# Altium PCB LM5161_Buck_PCB.PcbDoc (part 1 of 2)
Units mm, origin at the board's own origin, x right, y up, seen from the top; angles counter-clockwise.
Board outline 45.09 x 26.42 mm, 2 copper layers (Top Layer, Bottom Layer); 30 components, 16 nets, 70 pads, 9 vias.
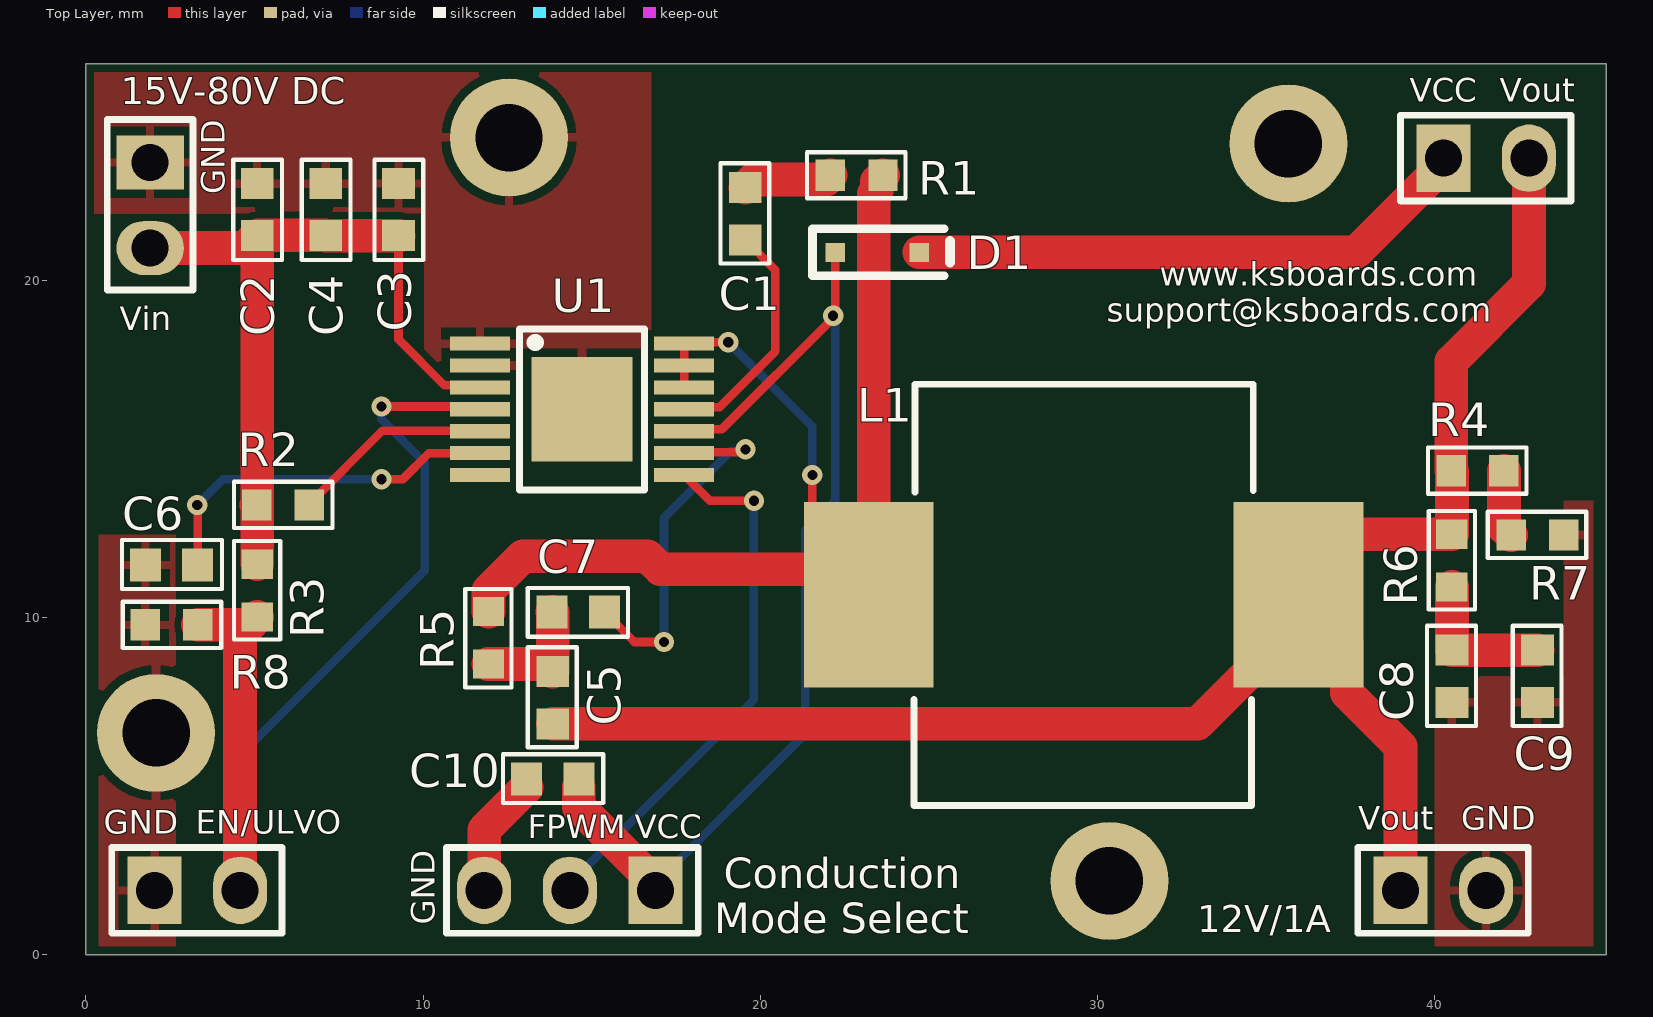
[diagram p0: Top Layer view]
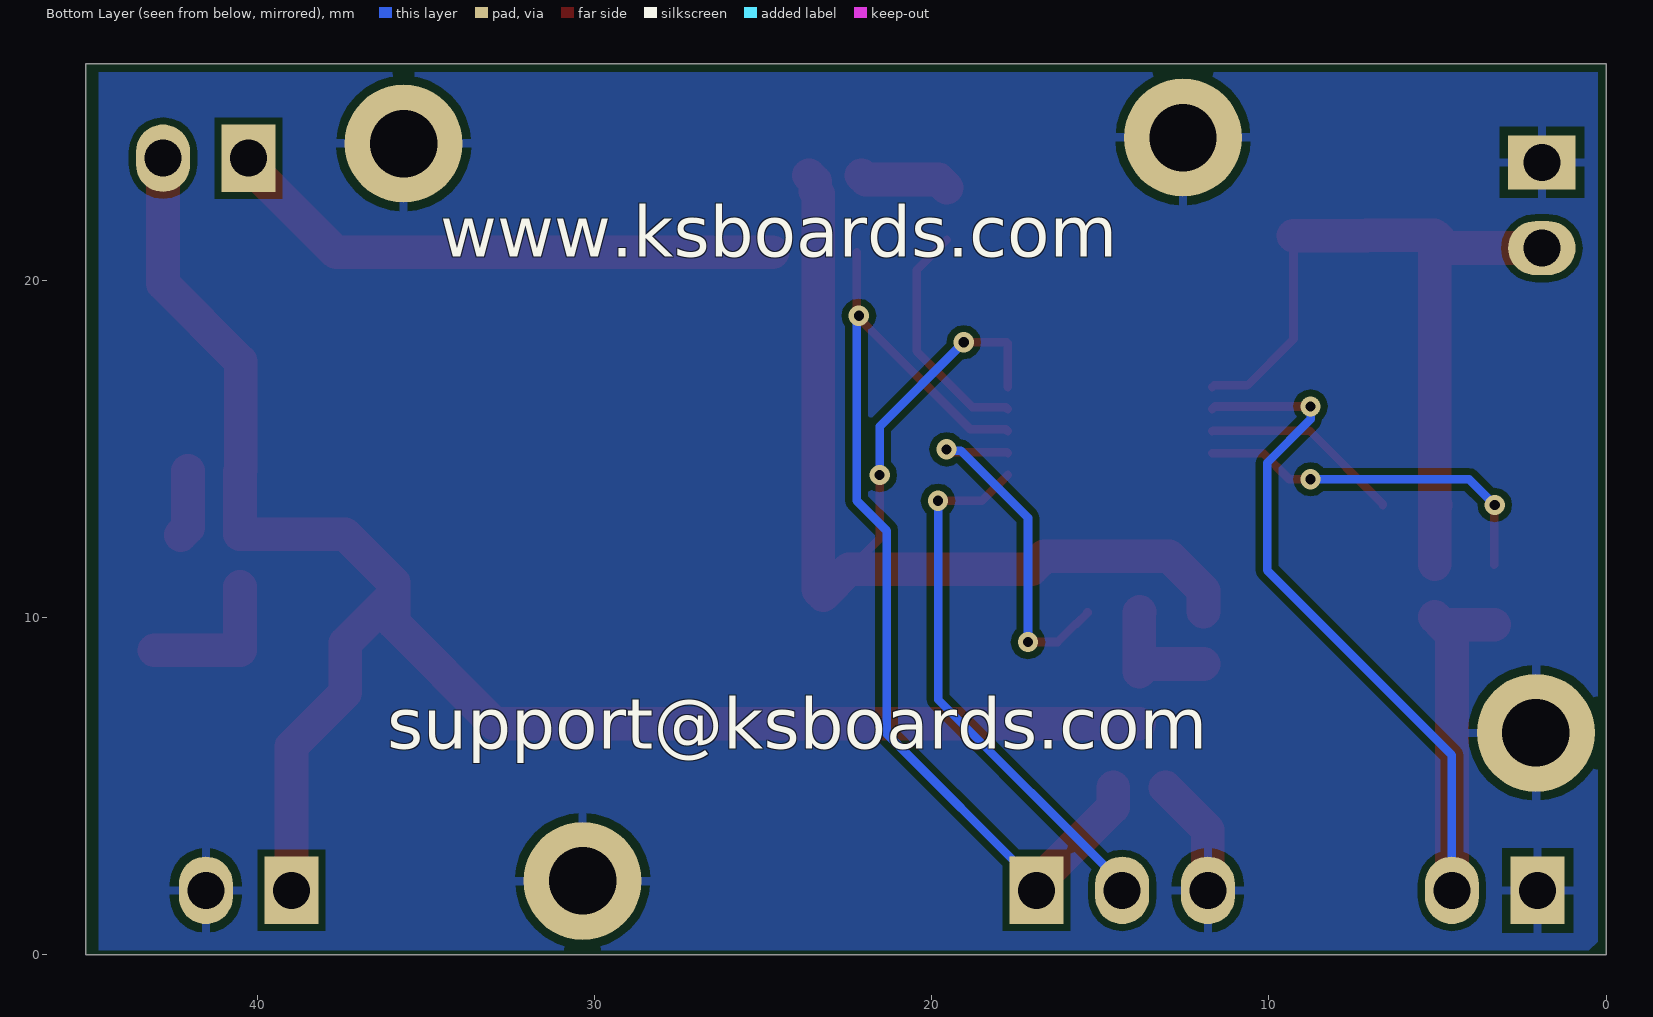
[diagram p1: Bottom Layer view, seen from below]
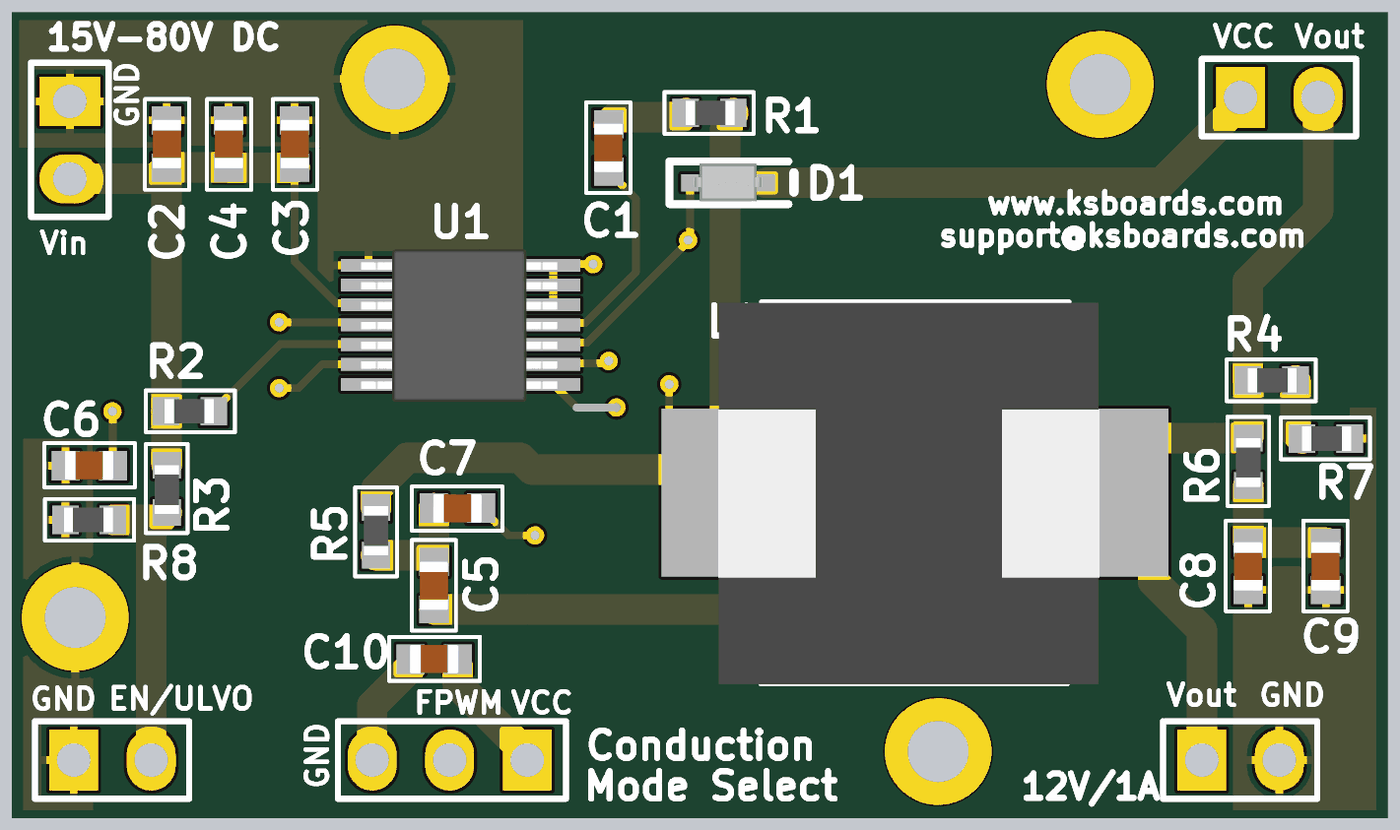
[diagram p2: 3D render of the assembled board from above, using the file's embedded part models]

## Layer stack, top to bottom
Top Solder: solder mask 0.0102, Solder Resist, Dk 3.5
Top Layer: signal copper 0.0356
Dielectric 1: dielectric 0.32, FR-4, Dk 4.8
Bottom Layer: signal copper 0.0356
Bottom Solder: solder mask 0.0102, Solder Resist, Dk 3.5

## Board outline
0,0 45.085,0 45.085,26.416 0,26.416

## Design rules (kind name [scope] priority, off if disabled: settings)
Clearance [All] p1: gap=0.2 ignorepadtopadclearanceinfootprint=FALSE
MinimumSolderMaskSliver [All] p1: minsoldermaskwidth=0.02
PolygonConnect [All] p1: connectstyle=Relief reliefconductorwidth=0.254 reliefentries=4 polygonreliefangle="90 Angle" airgapwidth=0.254
RoutingVias [All] p1: holewidth=0.711 width=1.27 viastyle="Through Hole" minholewidth=0.711 minwidth=1.27 maxholewidth=0.711 maxwidth=1.27
SilkToSilkClearance [All] p1: silktosilkclearance=0.06
SilkToSolderMaskClearance [IsPad] p1: minsilkscreentomaskgap=0.02 clearancetoexposedcopper=TRUE
SolderMaskExpansion [All] p1: expansion=0.102 istentingtop=FALSE
Width Width_POWER [All] p1: maxlimit=1 minlimit=0.245 preferedwidth=1
Width Width_1 [All] p2: maxlimit=0.254 minlimit=0.254 preferedwidth=0.254
27 further rules are at their usual default settings.

## Components (designator, comment, footprint, x,y, rotation, side; value= is the part's Value field where it differs from the comment)
C1 "0.01uF" C0603 19.558,21.971 r90 top
C2 "2.2uF" C0603 5.08,22.098 r270 top
C3 "100nF" C0603 9.271,22.098 r270 top
C4 "2.2uF" C0603 7.112,22.098 r270 top
C5 "1nF" C0603 13.843,7.62 r90 top
C6 "0.022uF" C0603 2.54,11.557 r0 top
C7 "100nF" C0603 14.605,10.16 r180 top
C8 "10uF" C0603 40.513,8.255 r90 top
C9 "10uF" C0603 43.053,8.255 r90 top
C10 "1uF" C0603 13.843,5.207 r0 top
Conduction "Select Conduction Mode" HDR_FEMALE_1x3_2.54mm 16.891,1.905 r270 top (schematic designator JP5)
D1 "SD103AWS-7-F  40V" SOD323 23.495,20.828 r180 top
EN/ULVO "EN/ULVO" HDR_FEMALE_1x2_2.54mm 2.032,1.905 r90 top (schematic designator JP4)
JP1 "HDR 1x2" HDR_FEMALE_1x2_2.54mm 40.259,23.622 r90 top
JP3 "OUT 12V / 1A" HDR_FEMALE_1x2_2.54mm 38.989,1.905 r90 top
L1 "DR125-101-R" IND2PADS 29.591,10.668 r0 top
MH1 "MH_3.5MM_3.5MMD" MH_3.5MMX3.5MM 12.548,24.232 r0 top
MH2 "MH_3.5MM_3.5MMD" MH_3.5MMX3.5MM 2.083,6.579 r0 top
MH3 "MH_3.5MM_3.5MMD" MH_3.5MMX3.5MM 30.353,2.184 r0 top
MH4 "MH_3.5MM_3.5MMD" MH_3.5MMX3.5MM 35.662,24.054 r0 top
R1 "0R" R0603 22.86,23.114 r180 top
R2 "402k" R0603 5.842,13.335 r0 top
R3 "75k" R0603 5.08,10.795 r90 top
R4 "10k" R0603 41.275,14.351 r180 top
R5 "100k" R0603 11.938,9.398 r270 top
R6 "0R" R0603 40.513,11.684 r90 top
R7 "2k" R0603 43.053,12.446 r180 top
R8 "6.81k" R0603 2.54,9.779 r0 top
U1 "LM5161PWPR" SOP15 14.714,16.174 r0 top
Vin "VIN 15V - 80V DC" HDR_FEMALE_1x2_2.54mm 1.905,23.495 r0 top (schematic designator JP2)

## Footprints (in the part's own frame and the unit in brackets; to place one, negate y for a bottom-side part, rotate by r counter-clockwise, add the part's x,y. Pads: shape width x height; smd on the part's side, far side on the other; paste and mask are expansions set on the pad)
C0603 [mm]
  rect 0.92x0.97 smd: 1(-0.775,0) 2(0.775,0)
  silkscreen extent -1.47,-0.71 1.5,0.74, body extent -0.8,-0.47 0.8,0.48, height 0.79
HDR_FEMALE_1x2_2.54mm [mm]
  rect 2x1.6 hole 1.1: 1(0,0)
  oval 2x1.6 hole 1.1: 2(0,-2.54)
  silkscreen extent -1.27,-3.78 1.27,1.27
HDR_FEMALE_1x3_2.54mm [mm]
  rect 2x1.6 hole 1.1: 1(0,0)
  oval 2x1.6 hole 1.1: 2(0,-2.54) 3(0,-5.08)
  silkscreen extent -1.27,-6.2 1.27,1.27
IND2PADS [mm]
  rect 3.85x5.5 smd: 1(-6.375,0) 2(6.375,0)
  silkscreen extent -5.03,-6.25 5.03,6.25, body extent -6.45,-6.27 6.05,6.22, height 8
MH_3.5MMX3.5MM [mm]
  round 3.5 hole 2 mask+0.05: 1(0,0)
R0603 [mm]
  rect 0.87x0.93 smd: 1(-0.78,0) 2(0.78,0)
  silkscreen extent -1.45,-0.69 1.47,0.69, body extent -0.83,-0.4 0.77,0.4, height 0.55
SOD323 [mil]
  rect 23x22 smd: 1(-48,0) 2(50,0)
  silkscreen extent -84,-28 77,28, body extent -48,-25 50,24, height 35
SOP15 [mm]
  rect 1.78x0.42 smd: 1(-3.03,1.95) 2(-3.03,1.3) 3(-3.03,0.65) 4(-3.03,0) 5(-3.03,-0.65) 6(-3.03,-1.3) 7(-3.03,-1.95) 8(3.03,-1.95) 9(3.03,-1.3) 10(3.03,-0.65) 11(3.03,0) 12(3.03,0.65) 13(3.03,1.3) 14(3.03,1.95)
  rect 3x3.1 smd: 15(0,0)
  silkscreen extent -1.85,-2.39 1.85,2.38, body extent -3.26,-2.53 3.16,2.47, height 1

## Part data
C1: library part C0603X103K5RACTU, "KEMET - C0603X103K5RACTU - SMD Multilayer Ceramic Capacitor, FT-CAP, 10000 pF, 50 V, 0603 [1608 Metric], ± 10%, X7R", Capacitance=10nF, Case Code (Imperial)=0603, Case Code (Metric)=1608, Dielectric=X7R, Dielectric Material=Ceramic, Manufacturer=KEMET, Max Operating Temperature=125°C, Min Operating Temperature=-55°C, Package Quantity=1, Supplier Part Number 1=399-5346-1-ND, Tolerance=10%, Voltage=50V, Case/Package=0603, Category="Ceramic Capacitors", ComponentLink1Description=https://datasheet.ciiva.com/22700/kem-c1002-x7r-smd-22700565.pdf?src-supplier=Element14, ComponentLink1URL=https://datasheet.ciiva.com/22700/kem-c1002-x7r-smd-22700565.pdf?src-supplier=Element14, ComponentLink2Description=https://datasheet.ciiva.com/28610/1918693-28610825.pdf?src-supplier=Element14, ComponentLink2URL=https://datasheet.ciiva.com/28610/1918693-28610825.pdf?src-supplier=Element14, ComponentLink3Description=https://datasheet.ciiva.com/14604/70096394-14604427.pdf?src-supplier=Allied+Electronics, ComponentLink3URL=https://datasheet.ciiva.com/14604/70096394-14604427.pdf?src-supplier=Allied+Electronics, ComponentLink4Description=https://datasheet.ciiva.com/5904/kem-c1002-x7r-smd-5904908.pdf?src-supplier=Farnell, ComponentLink4URL=https://datasheet.ciiva.com/5904/kem-c1002-x7r-smd-5904908.pdf?src-supplier=Farnell, ComponentLink5Description=https://datasheet.ciiva.com/18193/getdatasheetpartid-571854-18193228.pdf?src-supplier=Verical, ComponentLink5URL=https://datasheet.ciiva.com/18193/getdatasheetpartid-571854-18193228.pdf?src-supplier=Verical, ComponentLink6Description=https://datasheet.ciiva.com/26847/getdatasheetpartid-385605-26847756.pdf?src-supplier=Verical, ComponentLink6URL=https://datasheet.ciiva.com/26847/getdatasheetpartid-385605-26847756.pdf?src-supplier=Verical, Construction=Flat, Depth=0.8mm, Dissipation Factor=2.5%, Features="Soft Termination", Height=0.8mm, Length=1.6mm, Manufacturer Part Number=C0603X103K5RACTU, Mount="Surface Mount,PCB", Number of Pins=2, Packaging="Tape and Reel", Pricing 1="1=0,36000, 10=0,25000, 50=0,17520, 100=0,15020, 500=0,11262, 1000=0,09510 (USD)", Radiation Hardening=No, REACH SVHC="No SVHC", RoHS=Yes, RoHS Compliant=Yes, Series=C0603X, Stock 1=40616, Supplier 1=Digi-Key, Termination=SMD/SMT, Thickness=0.034inch, Voltage Rating=50V, Voltage Rating (DC)=50V, Width=0.8mm
C2 C4: library part C0603C225K4PACTU, "KEMET C0603C225K4PACTU - CAP, MLCC, X5R, 2.2UF, 16V, 0603", Case Code (Imperial)=0603, Case Code (Metric)=1608, Dielectric=X5R, Dielectric Material=Ceramic, Manufacturer=KEMET, Max Operating Temperature=85°C, Min Operating Temperature=-55°C, Package Quantity=1, Supplier Part Number 1=399-7886-1-ND, Tolerance=10%, Voltage=16V, Capacitance=2.2uF, Case/Package=0603, Category="Ceramic Capacitors", ComponentLink1Description=https://datasheet.ciiva.com/5969/1776083-5969304.pdf?src-supplier=Farnell, ComponentLink1URL=https://datasheet.ciiva.com/5969/1776083-5969304.pdf?src-supplier=Farnell, ComponentLink2Description=https://datasheet.ciiva.com/7823/1776083-7823706.pdf?src-supplier=Element14, ComponentLink2URL=https://datasheet.ciiva.com/7823/1776083-7823706.pdf?src-supplier=Element14, Construction=Flat, Contact Plating=Tin,Matte, Depth=0.8mm, Dissipation Factor=5%, Height=0.8mm, Lead Free="Lead Free", Length=1.6mm, Manufacturer Part Number=C0603C225K4PACTU, Mount="Surface Mount", Number of Pins=2, Packaging="Tape and Reel", Pricing 1="1=0,13000, 10=0,09000, 50=0,05080, 100=0,04210, 500=0,02952, 1000=0,02444 (USD)", Radiation Hardening=No, REACH SVHC="No SVHC", RoHS=Yes, RoHS Compliant=Yes, Series=C, Stock 1=245025, Supplier 1=Digi-Key, Termination=SMD/SMT, Thickness=0.034inch, Voltage Rating=16V, Voltage Rating (DC)=16V, Width=0.8mm
C3 C7: library part CC0603KRX7R9BB104, "CAPACITOR CERAMIC, 0.1UF, 50V, X7R, 10%, 0603", Case Code (Imperial)=0603, Case Code (Metric)=1608, Dielectric=X7R, Dielectric Material=Ceramic, Manufacturer=Yageo, Max Operating Temperature=125°C, Min Operating Temperature=-55°C, Package Quantity=1, Supplier Part Number 1=311-1344-1-ND, Tolerance=10%, Voltage=50V, Capacitance=100nF, Case/Package=0603, Category="Ceramic Capacitors", ComponentLink1Description=https://datasheet.ciiva.com/11786/0900766b80d84f1d-11786061.pdf?src-supplier=RSComponents, ComponentLink1URL=https://datasheet.ciiva.com/11786/0900766b80d84f1d-11786061.pdf?src-supplier=RSComponents, ComponentLink2Description=https://datasheet.ciiva.com/144/mlccorderingcode-144176.pdf?src-supplier=Digi-Key, ComponentLink2URL=https://datasheet.ciiva.com/144/mlccorderingcode-144176.pdf?src-supplier=Digi-Key, ComponentLink3Description=https://datasheet.ciiva.com/144/mlccorderingcode-144177.pdf?src-supplier=Digi-Key, ComponentLink3URL=https://datasheet.ciiva.com/144/mlccorderingcode-144177.pdf?src-supplier=Digi-Key, ComponentLink4Description=https://datasheet.ciiva.com/144/mlccorderingcode-144178.pdf?src-supplier=Digi-Key, ComponentLink4URL=https://datasheet.ciiva.com/144/mlccorderingcode-144178.pdf?src-supplier=Digi-Key, ComponentLink5Description=https://datasheet.ciiva.com/7978/1489800-7978166.pdf?src-supplier=Element14, ComponentLink5URL=https://datasheet.ciiva.com/7978/1489800-7978166.pdf?src-supplier=Element14, ComponentLink6Description=https://datasheet.ciiva.com/16625/upy-gphc-x7r-6-3v-to-50v-8-16625530.pdf?src-supplier=Avnet+Europe, ComponentLink6URL=https://datasheet.ciiva.com/16625/upy-gphc-x7r-6-3v-to-50v-8-16625530.pdf?src-supplier=Avnet+Europe, ComponentLink7Description=https://datasheet.ciiva.com/8033/70765-8033819.pdf?src-supplier=Element14, ComponentLink7URL=https://datasheet.ciiva.com/8033/70765-8033819.pdf?src-supplier=Element14, ComponentLink8Description=https://datasheet.ciiva.com/8033/70765-8033821.pdf?src-supplier=Element14, ComponentLink8URL=https://datasheet.ciiva.com/8033/70765-8033821.pdf?src-supplier=Element14, ComponentLink9Description=https://datasheet.ciiva.com/22749/1489800-22749214.pdf?src-supplier=Element14, ComponentLink9URL=https://datasheet.ciiva.com/22749/1489800-22749214.pdf?src-supplier=Element14, ComponentLink10Description=https://datasheet.ciiva.com/31394/1489800-31394927.pdf?src-supplier=Farnell, ComponentLink10URL=https://datasheet.ciiva.com/31394/1489800-31394927.pdf?src-supplier=Farnell, Depth=0.8mm, Halogen Free="Halogen Free", Height=0.8mm, Lead Free="Lead Free", Length=1.6mm, Manufacturer Part Number=CC0603KRX7R9BB104, Mount="Surface Mount", Number of Pins=2, Packaging="Tape and Reel", Pricing 1="1=0,10000, 10=0,05900, 50=0,03240, 100=0,02640, 500=0,01886, 1000=0,01482 (USD)", Radiation Hardening=No, REACH SVHC="No SVHC", RoHS=Yes, RoHS Compliant=Yes, Series=CC, Stock 1=8863982, Supplier 1=Digi-Key, Termination=SMD/SMT, Thickness=0.035inch, Voltage Rating=50V, Width=0.031inch
C5: library part C0603C102K5RACTU, "KEMET - C0603C102K5RACTU - SMD Multilayer Ceramic Capacitor, 1000 pF, 50 V, 0603 [1608 Metric], ± 10%, X7R, C Series KEMET", Case Code (Imperial)=0603, Case Code (Metric)=1608, Dielectric=X7R, Dielectric Material=Ceramic, Manufacturer=KEMET, Max Operating Temperature=125°C, Min Operating Temperature=-55°C, Package Quantity=1, Supplier Part Number 1=399-1082-1-ND, Tolerance=10%, Voltage=50V, Capacitance=1nF, Case/Package=0603, Category="Ceramic Capacitors", ComponentLink1Description=https://datasheet.ciiva.com/14589/70095383-14589013.pdf?src-supplier=Allied+Electronics, ComponentLink1URL=https://datasheet.ciiva.com/14589/70095383-14589013.pdf?src-supplier=Allied+Electronics, ComponentLink2Description=https://datasheet.ciiva.com/18192/getdatasheetpartid-110033-18192647.pdf?src-supplier=Verical, ComponentLink2URL=https://datasheet.ciiva.com/18192/getdatasheetpartid-110033-18192647.pdf?src-supplier=Verical, ComponentLink3Description=https://datasheet.ciiva.com/22749/1918693-22749719.pdf?src-supplier=Element14, ComponentLink3URL=https://datasheet.ciiva.com/22749/1918693-22749719.pdf?src-supplier=Element14, ComponentLink4Description=https://datasheet.ciiva.com/14586/70095383-14586057.pdf?src-supplier=Allied+Electronics, ComponentLink4URL=https://datasheet.ciiva.com/14586/70095383-14586057.pdf?src-supplier=Allied+Electronics, ComponentLink5Description=https://datasheet.ciiva.com/28645/1851736-28645563.pdf?src-supplier=Element14, ComponentLink5URL=https://datasheet.ciiva.com/28645/1851736-28645563.pdf?src-supplier=Element14, Construction=Flat, Contact Plating=Tin,Matte, Depth=0.8mm, Dissipation Factor=2.5%, Height=0.8mm, Lead Pitch=0.7mm, Length=1.6mm, Manufacturer Part Number=C0603C102K5RACTU, Mount="Surface Mount,PCB", Number of Pins=2, Packaging="Tape and Reel", Pricing 1="1=0,10000, 10=0,06100, 50=0,03320, 100=0,02700, 500=0,01932, 1000=0,01518 (USD)", Radiation Hardening=No, REACH SVHC="No SVHC", RoHS=Yes, RoHS Compliant=Yes, Series=C, Stock 1=888320, Supplier 1=Digi-Key, Termination=SMD/SMT, Thickness=0.034inch, Voltage Rating=50V, Voltage Rating (DC)=50V, Width=0.8mm
C6: library part C0603C223K4RACTU, "Cap Ceramic 0.022uF 16V X7R 10% SMD 0603 125°C Paper T/R", Capacitance=22nF, Case Code (Imperial)=0603, Case Code (Metric)=1608, Dielectric=X7R, Manufacturer=KEMET, Max Operating Temperature=125°C, Min Operating Temperature=-55°C, Package Quantity=1, Supplier Part Number 1=399-1093-1-ND, Tolerance=10%, Voltage Rating=16V, Case/Package=0603, Category="Ceramic Capacitors", ComponentLink1Description=https://datasheet.ciiva.com/26847/getdatasheetpartid-724406-26847612.pdf?src-supplier=Verical, ComponentLink1URL=https://datasheet.ciiva.com/26847/getdatasheetpartid-724406-26847612.pdf?src-supplier=Verical, ComponentLink2Description=https://datasheet.ciiva.com/14599/70095383-14599397.pdf?src-supplier=Allied+Electronics, ComponentLink2URL=https://datasheet.ciiva.com/14599/70095383-14599397.pdf?src-supplier=Allied+Electronics, ComponentLink3Description=https://datasheet.ciiva.com/49516/1636924-49516646.pdf?src-supplier=Jameco, ComponentLink3URL=https://datasheet.ciiva.com/49516/1636924-49516646.pdf?src-supplier=Jameco, ComponentLink4Description=https://datasheet.ciiva.com/14601/70095383-14601245.pdf?src-supplier=Allied+Electronics, ComponentLink4URL=https://datasheet.ciiva.com/14601/70095383-14601245.pdf?src-supplier=Allied+Electronics, Construction=Flat, Depth=0.8mm, Height=0.8mm, Length=1.6mm, Manufacturer Part Number=C0603C223K4RACTU, Mount="Surface Mount", Packaging="Tape and Reel", Pricing 1="1=0,10000, 10=0,06300, 50=0,03440, 100=0,02820, 500=0,02012, 1000=0,01581 (USD)", Radiation Hardening=No, REACH SVHC="No SVHC", RoHS=Yes, RoHS Compliant=Yes, Series=C, Stock 1=127241, Supplier 1=Digi-Key, Termination=SMD/SMT, Thickness=0.034inch, Voltage Rating (DC)=16V, Weight=7.1E-05oz, Width=0.8mm
C8 C9: library part C0603C106M9PACTU, "KEMET - C0603C106M9PACTU - CAP, MLCC, X5R, 10UF, 6.3V, 0603", Case Code (Imperial)=0603, Case Code (Metric)=1608, Dielectric=X5R, Dielectric Material=Ceramic, Manufacturer=KEMET, Max Operating Temperature=85°C, Min Operating Temperature=-55°C, Package Quantity=4000, Supplier Part Number 1=399-5504-1-ND, Tolerance=20%, Voltage=6.3V, Capacitance=10uF, Case/Package=0603, Category="Ceramic Capacitors", ComponentLink1Description=http://www.farnell.com/datasheets/2739682.pdf?src-supplier=Farnell, ComponentLink1URL=http://www.farnell.com/datasheets/2739682.pdf?src-supplier=Farnell, ComponentLink2Description=http://uk.rs-online.com/webdocs/1515/0900766b8151511d.pdf?src-supplier=RSComponents, ComponentLink2URL=http://uk.rs-online.com/webdocs/1515/0900766b8151511d.pdf?src-supplier=RSComponents, ComponentLink3Description=http://www.farnell.com/datasheets/1918694.pdf?src-supplier=Farnell, ComponentLink3URL=http://www.farnell.com/datasheets/1918694.pdf?src-supplier=Farnell, ComponentLink4Description=http://components.arrow.com/part/dataview/0323_00011321?src-supplier=Arrow+Europe, ComponentLink4URL=http://components.arrow.com/part/dataview/0323_00011321?src-supplier=Arrow+Europe, ComponentLink5Description=https://www.verical.com/server-webapp/html/getDatasheet?partID=353664&src-supplier=Verical, ComponentLink5URL=https://www.verical.com/server-webapp/html/getDatasheet?partID=353664&src-supplier=Verical, ComponentLink6Description=http://components.arrow.com/part/dataview/42932973S8313645N7429?src-supplier=Arrow+Electronics, ComponentLink6URL=http://components.arrow.com/part/dataview/42932973S8313645N7429?src-supplier=Arrow+Electronics, ComponentLink7Description=http://www.farnell.com/datasheets/2315129.pdf?src-supplier=Allied+Electronics, ComponentLink7URL=http://www.farnell.com/datasheets/2315129.pdf?src-supplier=Allied+Electronics, ComponentLink8Description=http://www.farnell.com/datasheets/2315129.pdf?src-supplier=RSComponents, ComponentLink8URL=http://www.farnell.com/datasheets/2315129.pdf?src-supplier=RSComponents, ComponentLink9Description=https://api.kemet.com/component-edge/download/datasheet/C0603C106M9PACTU.pdf?src-supplier=Digi-Key, ComponentLink9URL=https://api.kemet.com/component-edge/download/datasheet/C0603C106M9PACTU.pdf?src-supplier=Digi-Key, ComponentLink10Description=http://www.kemet.com/kemet/web/homepage/kechome.nsf/weben/ADB5E2666EC6BA90CA2570A50016092E/$file/KEM_C1005_Y5V_SMD.pdf?src-supplier=Avnet, ComponentLink10URL=http://www.kemet.com/kemet/web/homepage/kechome.nsf/weben/ADB5E2666EC6BA90CA2570A50016092E/$file/KEM_C1005_Y5V_SMD.pdf?src-supplier=Avnet, ComponentLink11Description=http://www.farnell.com/datasheets/2315129.pdf?src-supplier=Verical, ComponentLink11URL=http://www.farnell.com/datasheets/2315129.pdf?src-supplier=Verical, ComponentLink12Description=http://www.farnell.com/datasheets/2739682.pdf?src-supplier=Newark, ComponentLink12URL=http://www.farnell.com/datasheets/2739682.pdf?src-supplier=Newark, ComponentLink13Description=http://www.farnell.com/datasheets/2739682.pdf?src-supplier=Element14, ComponentLink13URL=http://www.farnell.com/datasheets/2739682.pdf?src-supplier=Element14, ComponentLink14Description=http://www.farnell.com/datasheets/2315129.pdf?src-supplier=Distrelec, ComponentLink14URL=http://www.farnell.com/datasheets/2315129.pdf?src-supplier=Distrelec, ComponentLink15Description=http://www.farnell.com/datasheets/2315129.pdf?src-supplier=Avnet+Asia, ComponentLink15URL=http://www.farnell.com/datasheets/2315129.pdf?src-supplier=Avnet+Asia, ComponentLink16Description=http://www.farnell.com/datasheets/2315129.pdf?src-supplier=Mouser, ComponentLink16URL=http://www.farnell.com/datasheets/2315129.pdf?src-supplier=Mouser, ComponentLink17Description=http://www.kemet.com/kemet/web/homepage/kechome.nsf/file/Commercial%20Ceramic%20Chips%20X5R%20Dielectric/$file/KEM_C1006_X5R_SMD.pdf?src-supplier=Element14, ComponentLink17URL=http://www.kemet.com/kemet/web/homepage/kechome.nsf/file/Commercial%20Ceramic%20Chips%20X5R%20Dielectric/$file/KEM_C1006_X5R_SMD.pdf?src-supplier=Element14, ComponentLink18Description=http://capacitoredge.kemet.com/capedge2/DataSheet?pn=C0603C106M9PAC7867&src-supplier=Avnet, ComponentLink18URL=http://capacitoredge.kemet.com/capedge2/DataSheet?pn=C0603C106M9PAC7867&src-supplier=Avnet, ComponentLink19Description=http://www.farnell.com/datasheets/2315129.pdf?src-supplier=Quest, ComponentLink19URL=http://www.farnell.com/datasheets/2315129.pdf?src-supplier=Quest, ComponentLink20Description=http://www.farnell.com/datasheets/2315129.pdf?src-supplier=TTI, ComponentLink20URL=http://www.farnell.com/datasheets/2315129.pdf?src-supplier=TTI, ComponentLink21Description=http://www.farnell.com/datasheets/2315129.pdf?src-supplier=TME, ComponentLink21URL=http://www.farnell.com/datasheets/2315129.pdf?src-supplier=TME, Construction=Flat, Depth=0.8mm, Height=0.8mm, Length=1.6mm, Manufacturer Part Number=C0603C106M9PACTU, Mount="PCB,Surface Mount", Number of Pins=2, Packaging="Tape and Reel", Pricing 1="1=0,32000, 10=0,22000, 50=0,14680, 100=0,12470, 500=0,08804, 1000=0,07704 (USD)", Radiation Hardening=No, REACH SVHC="No SVHC", RoHS=Yes, RoHS Compliant=Yes, Series=C0603C, Stock 1=524749, Supplier 1=Digi-Key, Termination=SMD/SMT, Voltage Rating=6.3V, Voltage Rating (DC)=6.3V
C10: library part C0603C105K3PACTU, "KEMET - C0603C105K3PACTU - SMD Multilayer Ceramic Capacitor, 1 µF, 25 V, 0603 [1608 Metric], ± 10%, X5R, C Series KEMET", Case Code (Imperial)=0603, Case Code (Metric)=1608, Dielectric=X5R, Dielectric Material=Ceramic, Manufacturer=KEMET, Max Operating Temperature=85°C, Min Operating Temperature=-55°C, Package Quantity=4000, Supplier Part Number 1=399-7846-1-ND, Tolerance=10%, Voltage=25V, Capacitance=1uF, Case/Package=0603, Category="Ceramic Capacitors", ComponentLink1Description=https://datasheet.ciiva.com/28610/1918694-28610792.pdf?src-supplier=Element14, ComponentLink1URL=https://datasheet.ciiva.com/28610/1918694-28610792.pdf?src-supplier=Element14, ComponentLink2Description=https://datasheet.ciiva.com/5998/40889-5998745.pdf?src-supplier=Farnell, ComponentLink2URL=https://datasheet.ciiva.com/5998/40889-5998745.pdf?src-supplier=Farnell, Construction=Flat, Contact Plating=Tin,Matte, Depth=0.8mm, Height=0.8mm, Lead Free="Lead Free", Length=1.6mm, Manufacturer Part Number=C0603C105K3PACTU, Mount="Surface Mount,PCB", Number of Pins=2, Packaging="Tape and Reel", Pricing 1="1=0,19000, 10=0,13300, 50=0,07540, 100=0,06250, 500=0,04384, 1000=0,03630 (USD)", Radiation Hardening=No, REACH SVHC="No SVHC", RoHS=Yes, RoHS Compliant=Yes, Series=C0603C, Stock 1=91592, Supplier 1=Digi-Key, Termination=SMD/SMT, Thickness=0.034inch, Voltage Rating=25V, Voltage Rating (DC)=25V, Width=0.031inch
Conduction: library part 1765344, "MSTB 2 5/ 3-ST BD: 1-3", Color=Green, Current=15A, Current Rating=12A, Flammability Rating="UL94 V-0", Manufacturer="Phoenix Contact", Package Quantity=50, Supplier Part Number 1=277-1958-ND, Voltage=300V, Voltage Rating=250V, Category="Terminal Blocks", ComponentLink1Description=https://datasheet.ciiva.com/16046/1765344-16046432.pdf?src-supplier=Onlinecomponents.com, ComponentLink1URL=https://datasheet.ciiva.com/16046/1765344-16046432.pdf?src-supplier=Onlinecomponents.com, ComponentLink2Description=https://datasheet.ciiva.com/795/1765344-795481.pdf?src-supplier=Digi-Key, ComponentLink2URL=https://datasheet.ciiva.com/795/1765344-795481.pdf?src-supplier=Digi-Key, Connector Type=Screw, Contact Material=Tin, Contact Plating=Tin, Gender=Female, Height=15mm, Housing Color=Green, Housing Material=Plastic, Length=15mm, Manufacturer Part Number=1765344, Material=Polyamide, Max Current Rating=12A, Mount="Free Hanging,Plug-In", Number of Contacts=3, Number of Levels=1, Number of Poles=3, Number of Positions=3, Number of Positions Per Level=3, Number of Rows=1, Packaging=Bulk, Pitch=5mm, Pricing 1="1=3,07000, 10=2,98500, 50=2,79000, 100=2,56680, 250=2,37148, 500=2,25990, 1000=2,12040 (USD)", RoHS=Yes, RoHS Compliant=Yes, Series="COMBICON MSTB", Stock 1=3, Stripping Length=7mm, Supplier 1=Digi-Key, Termination=Screw, Weight=4.409lb, Width=18.2mm, Wire Gauge (Max)=12AWG, Wire Gauge (Min)=24AWG
D1: library part SD103AWS-7-F, "Diode Schottky 40V 0.35A Automotive 2-Pin SOD-323 T/R", Average Rectified Current=350mA, Capacitance=28pF, Current=15A, Forward Voltage=600mV, Manufacturer=Diodes, Max Forward Surge Current (Ifsm)=1.5A, Max Operating Temperature=125°C, Max Power Dissipation=200mW, Max Repetitive Reverse Voltage (Vrrm)=40V, Max Reverse Current=5uA, Min Operating Temperature=-65°C, Package Quantity=3000, Supplier Part Number 1=SD103AWS-FDICT-ND, Category="Schottky Diodes", ComponentLink1Description=https://datasheet.ciiva.com/34302/1541917-34302427.pdf?src-supplier=Jameco, ComponentLink1URL=https://datasheet.ciiva.com/34302/1541917-34302427.pdf?src-supplier=Jameco, ComponentLink2Description=https://datasheet.ciiva.com/17068/0900766b80e30fe8-17068236.pdf?src-supplier=Allied+Electronics, ComponentLink2URL=https://datasheet.ciiva.com/17068/0900766b80e30fe8-17068236.pdf?src-supplier=Allied+Electronics, ComponentLink3Description=https://datasheet.ciiva.com/15144/getdatasheetpartid-89223-15144637.pdf?src-supplier=Verical, ComponentLink3URL=https://datasheet.ciiva.com/15144/getdatasheetpartid-89223-15144637.pdf?src-supplier=Verical, ComponentLink4Description=https://datasheet.ciiva.com/912/ds30101-912900.pdf?src-supplier=Digi-Key, ComponentLink4URL=https://datasheet.ciiva.com/912/ds30101-912900.pdf?src-supplier=Digi-Key, ComponentLink5Description=https://datasheet.ciiva.com/912/ds30101-912901.pdf?src-supplier=Digi-Key, ComponentLink5URL=https://datasheet.ciiva.com/912/ds30101-912901.pdf?src-supplier=Digi-Key, ComponentLink6Description=https://datasheet.ciiva.com/16476/ds30101-16476773.pdf?src-supplier=Avnet+Asia, ComponentLink6URL=https://datasheet.ciiva.com/16476/ds30101-16476773.pdf?src-supplier=Avnet+Asia, ComponentLink7Description=https://datasheet.ciiva.com/912/ds30101-912902.pdf?src-supplier=Digi-Key, ComponentLink7URL=https://datasheet.ciiva.com/912/ds30101-912902.pdf?src-supplier=Digi-Key, ComponentLink8Description=https://datasheet.ciiva.com/22695/1911709-22695846.pdf?src-supplier=Element14, ComponentLink8URL=https://datasheet.ciiva.com/22695/1911709-22695846.pdf?src-supplier=Element14, ComponentLink9Description=https://datasheet.ciiva.com/7964/ds30101-7964328.pdf?src-supplier=Element14, ComponentLink9URL=https://datasheet.ciiva.com/7964/ds30101-7964328.pdf?src-supplier=Element14, ComponentLink10Description=https://datasheet.ciiva.com/8301/ds30101-8301401.pdf?src-supplier=Avnet, ComponentLink10URL=https://datasheet.ciiva.com/8301/ds30101-8301401.pdf?src-supplier=Avnet, ComponentLink11Description=https://datasheet.ciiva.com/25945/ds30101-25945898.pdf?src-supplier=Avnet+Europe, ComponentLink11URL=https://datasheet.ciiva.com/25945/ds30101-25945898.pdf?src-supplier=Avnet+Europe, Contact Plating=Tin,Matte, Current Rating=350mA, Element Configuration=Single, Forward Current=350mA, Height=1mm, Lead Free="Lead Free", Length=1.8mm, Manufacturer Part Number=SD103AWS-7-F, Max Reverse Voltage (DC)=40V, Mount="Surface Mount", Number of Pins=2, Output Current=350mA, Packaging="Tape and Reel", Peak Non-Repetitive Surge Current=1.5A, Polarity=Standard, Power Dissipation=200mW, Power Rating=200mW, Pricing 1="1=0,39000, 10=0,27400, 100=0,13830, 500=0,12258, 1000=0,09540 (USD)", Radiation Hardening=No, REACH SVHC="No SVHC", Reverse Recovery Time=10ns, RoHS=Yes, RoHS Compliant=Yes, Series=-, Stock 1=26272, Supplier 1=Digi-Key, Termination=SMD/SMT, Voltage=40V, Voltage Rating (DC)=40V, Weight=0.000173oz, Width=1.4mm
EN/ULVO JP1 JP3 Vin: library part 1729128, "TERMINAL BLOCK, WIRE TO BRD, 2POS, 16AWG", Color=Green, Current=10A, Current Rating=13.5A, Flammability Rating="UL94 V-0", Manufacturer="Phoenix Contact", Max Operating Temperature=100°C, Max Supply Voltage=400V, Min Operating Temperature=-20°C, Package Quantity=50, Supplier Part Number 1=277-1247-ND, Test Voltage=4kV, Voltage=300V, Approvals=UL,CSA, Category="Terminal Blocks", ComponentLink1Description=https://datasheet.ciiva.com/823/1729128-823779.pdf?src-supplier=Digi-Key, ComponentLink1URL=https://datasheet.ciiva.com/823/1729128-823779.pdf?src-supplier=Digi-Key, ComponentLink2Description=https://datasheet.ciiva.com/15169/getdatasheetpartid-199310-15169845.pdf?src-supplier=Verical, ComponentLink2URL=https://datasheet.ciiva.com/15169/getdatasheetpartid-199310-15169845.pdf?src-supplier=Verical, ComponentLink3Description=https://datasheet.ciiva.com/16046/1729128-16046181.pdf?src-supplier=Onlinecomponents.com, ComponentLink3URL=https://datasheet.ciiva.com/16046/1729128-16046181.pdf?src-supplier=Onlinecomponents.com, ComponentLink4Description=https://datasheet.ciiva.com/14607/70054405-14607157.pdf?src-supplier=Allied+Electronics, ComponentLink4URL=https://datasheet.ciiva.com/14607/70054405-14607157.pdf?src-supplier=Allied+Electronics, ComponentLink5Description=https://datasheet.ciiva.com/29218/743664-da-01-en-printklemmenblock-mkdsn-1-5-2-5-08-29218154.pdf?src-supplier=Conrad, ComponentLink5URL=https://datasheet.ciiva.com/29218/743664-da-01-en-printklemmenblock-mkdsn-1-5-2-5-08-29218154.pdf?src-supplier=Conrad, Connector Type=Screw, Contact Material=Tin, Depth=8.1mm, Height=13.5mm, Housing Color=Green, Housing Material=Polyamide, Insulation Material=Nylon, Lead Free="Lead Free", Length=8.1mm, Manufacturer Part Number=1729128, Max Current Rating=13.5A, Mount="Through Hole", Number of Circuits=2, Number of Contacts=2, Number of Levels=1, Number of Pins=2, Number of Poles=2, Number of Positions=2, Number of Positions Per Level=2, Number of Rows=1, Orientation=Straight, Packaging=Bulk, Pitch=5.08mm, Pricing 1="1=1,09000, 10=1,04700, 50=1,00100, 100=0,97370, 250=0,91000, 500=0,83720, 1000=0,77350, 2500=0,73710, 5000=0,69160 (USD)", Radiation Hardening=No, REACH SVHC="No SVHC", RoHS=Yes, RoHS Compliant=Yes, Series=MKDSN, Stock 1=22255, Supplier 1=Digi-Key, Termination=Solder, Voltage Rating=400V, Weight=0.069842oz, Width=13.5mm, Wire Gauge (Max)=26AWG, Wire Gauge (Min)=14AWG, Wire/Cable Gauge=26AWG
L1: "Inductor Power Shielded Drum Core 102.7uH/100uH 20% 100KHz Ferrite 1.78A 170mOhm DCR T/R", Case/Package=Nonstandard, Current Rating=1.78A, DC Resistance (DCR)=170mR, Inductance=100uH, Inductance Tolerance=20%, Manufacturer="Eaton Cooper", Max DC Current=2.2A, Max Operating Temperature=125°C, Min Operating Temperature=-40°C, Package Quantity=600, Resistor Type=Wirewound, Self Resonant Frequency=100kHz, Supplier Part Number 1=513-1526-1-ND, Category="Fixed Inductors", ComponentLink1Description=https://datasheet.ciiva.com/14667/0900766b8116a153-14667792.pdf?src-supplier=RSComponents, ComponentLink1URL=https://datasheet.ciiva.com/14667/0900766b8116a153-14667792.pdf?src-supplier=RSComponents, ComponentLink2Description=https://datasheet.ciiva.com/26858/getdatasheetpartid-246996-26858383.pdf?src-supplier=Verical, ComponentLink2URL=https://datasheet.ciiva.com/26858/getdatasheetpartid-246996-26858383.pdf?src-supplier=Verical, ComponentLink3Description=https://datasheet.ciiva.com/16941/70037876-16941189.pdf?src-supplier=Allied+Electronics, ComponentLink3URL=https://datasheet.ciiva.com/16941/70037876-16941189.pdf?src-supplier=Allied+Electronics, ComponentLink4Description=https://datasheet.ciiva.com/4958/bus-elx-ds-4315-dr-series-4958744.pdf?src-supplier=Mouser, ComponentLink4URL=https://datasheet.ciiva.com/4958/bus-elx-ds-4315-dr-series-4958744.pdf?src-supplier=Mouser, ComponentLink5Description=https://datasheet.ciiva.com/8004/87246-8004859.pdf?src-supplier=Element14, ComponentLink5URL=https://datasheet.ciiva.com/8004/87246-8004859.pdf?src-supplier=Element14, ComponentLink6Description=https://datasheet.ciiva.com/16209/bus-elx-ds-4315-dr-series-16209711.pdf?src-supplier=Future+Electronics, ComponentLink6URL=https://datasheet.ciiva.com/16209/bus-elx-ds-4315-dr-series-16209711.pdf?src-supplier=Future+Electronics, Core Material=Ferrite, DC Current=1.78A, Depth=12.5mm, Height=6mm, Height - Seated (Max)=0.236inch, Lead Free="Lead Free", Length=12.5mm, Manufacturer Part Number=DR125-101-R, Military Standard=Not, Mount="Surface Mount", Packaging="Tape and Reel", Pricing 1="1=1,22000, 10=1,13800, 25=1,05000, 50=0,87500, 100=0,82250, 250=0,73500 (USD)", Radiation Hardening=No, Rated Current-Max=1.78A, REACH SVHC="No SVHC", RMS Current (Irms)=1.78A, RoHS=Yes, RoHS Compliant=Yes, Saturation Current=2.2A, Series=DR, Shielding=Shielded, Stock 1=598, Supplier 1=Digi-Key, Termination=SMD/SMT, Test Frequency=100kHz, Tolerance=20%, Weight=0.144oz, Width=12.5mm
MH1 MH2 MH3 MH4: library part MH_3.5MM_3.5MM, "Mounting hole 3.5mm diameter 2mm drill hole"
R1 R6: library part CRCW06030000Z0EC, "VISHAY - CRCW06030000Z0EC - RES, AEC-Q200, THICK FILM, 0R, 0.1W, 0603", Case Code (Imperial)=0603, Case Code (Metric)=1608, Manufacturer="Vishay Dale", Max Operating Temperature=155°C, Max Power Dissipation=100mW, Min Operating Temperature=-55°C, Resistor Type="Thick Film", Supplier Part Number 1=541-2969-1-ND, Case/Package=0603, Category="Chip SMD Resistors", ComponentLink1Description=https://datasheet.ciiva.com/16199/dcrcwe3-16199083.pdf?src-supplier=Future+Electronics, ComponentLink1URL=https://datasheet.ciiva.com/16199/dcrcwe3-16199083.pdf?src-supplier=Future+Electronics, Construction=Rectangular, Contact Plating=Tin, Depth=0.85mm, Features="Automotive AEC-Q200", Height=0.02inch, Lead Free="Lead Free", Length=0.061inch, Manufacturer Part Number=CRCW06030000Z0EC, Military Standard=Not, Mount="Surface Mount", Number of Terminations=2, Packaging="Tape and Reel", Power Rating=100mW, Pricing 1="1=0,10000, 10=0,02800, 25=0,02040, 50=0,01540, 100=0,01140, 250=0,00868, 500=0,00694, 1000=0,00511, 5000=0,00367 (USD)", Radiation Hardening=No, Resistance=0R, RoHS=Yes, RoHS Compliant=Yes, Series=CRCW, Stock 1=17802, Supplier 1=Digi-Key, Width=0.033inch
R2: library part CRCW0603402KFKEA, "Res Thick Film 0603 402K Ohm 1% 0.1W(1/10W) ±100ppm/C Molded SMD Automotive Paper T/R", Case Code (Imperial)=0603, Case Code (Metric)=1608, Manufacturer=Vishay, Max Operating Temperature=155°C, Max Power Dissipation=100mW, Min Operating Temperature=-55°C, Package Quantity=10, Resistance=402kR, Resistance Tolerance=1%, Resistor Type="Thick Film", Supplier Part Number 1=541-402KHCT-ND, Temperature Coefficient=100ppm/°C, Voltage Rating=75V, Case/Package=0603, Category="Chip SMD Resistors", ComponentLink1Description=https://datasheet.ciiva.com/2466/dcrcwe3-2466641.pdf?src-supplier=Digi-Key, ComponentLink1URL=https://datasheet.ciiva.com/2466/dcrcwe3-2466641.pdf?src-supplier=Digi-Key, ComponentLink2Description=https://datasheet.ciiva.com/2466/dcrcwe3-2466642.pdf?src-supplier=Digi-Key, ComponentLink2URL=https://datasheet.ciiva.com/2466/dcrcwe3-2466642.pdf?src-supplier=Digi-Key, ComponentLink3Description=https://datasheet.ciiva.com/2466/dcrcwe3-2466643.pdf?src-supplier=Digi-Key, ComponentLink3URL=https://datasheet.ciiva.com/2466/dcrcwe3-2466643.pdf?src-supplier=Digi-Key, ComponentLink4Description=https://datasheet.ciiva.com/3257/dcrcwe3-3257561.pdf?src-supplier=Avnet, ComponentLink4URL=https://datasheet.ciiva.com/3257/dcrcwe3-3257561.pdf?src-supplier=Avnet, ComponentLink5Description=https://datasheet.ciiva.com/16427/dcrcwe3-16427337.pdf?src-supplier=Future+Electronics, ComponentLink5URL=https://datasheet.ciiva.com/16427/dcrcwe3-16427337.pdf?src-supplier=Future+Electronics, ComponentLink6Description=https://datasheet.ciiva.com/16769/70201119-16769689.pdf?src-supplier=Allied+Electronics, ComponentLink6URL=https://datasheet.ciiva.com/16769/70201119-16769689.pdf?src-supplier=Allied+Electronics, ComponentLink7Description=https://datasheet.ciiva.com/5541/dcrcwe3-109170-5541596.pdf?src-supplier=Mouser, ComponentLink7URL=https://datasheet.ciiva.com/5541/dcrcwe3-109170-5541596.pdf?src-supplier=Mouser, ComponentLink8Description=https://datasheet.ciiva.com/7792/125364-7792268.pdf?src-supplier=Element14, ComponentLink8URL=https://datasheet.ciiva.com/7792/125364-7792268.pdf?src-supplier=Element14, ComponentLink9Description=https://datasheet.ciiva.com/22705/1697337-22705964.pdf?src-supplier=Element14, ComponentLink9URL=https://datasheet.ciiva.com/22705/1697337-22705964.pdf?src-supplier=Element14, ComponentLink10Description=https://datasheet.ciiva.com/7674/1697337-7674093.pdf?src-supplier=Element14, ComponentLink10URL=https://datasheet.ciiva.com/7674/1697337-7674093.pdf?src-supplier=Element14, ComponentLink11Description=https://datasheet.ciiva.com/7674/1697337-7674094.pdf?src-supplier=Element14, ComponentLink11URL=https://datasheet.ciiva.com/7674/1697337-7674094.pdf?src-supplier=Element14, Construction=Rectangular, Contact Plating=Tin, Depth=0.85mm, Features="Automotive AEC-Q200", Height=0.45mm, Lead Free="Lead Free", Length=1.55mm, Manufacturer Part Number=CRCW0603402KFKEA, Military Standard=Not, Number of Pins=2, Number of Terminations=2, Packaging="Tape and Reel", Power Rating=100mW, Pricing 1="1=0,10000, 10=0,03600, 100=0,01450, 1000=0,00652, 2500=0,00566 (USD)", Radiation Hardening=No, REACH SVHC=Unknown, RoHS=Yes, RoHS Compliant=Yes, Series=CRCW, Size Code=0603, Stock 1=11071, Supplier 1=Digi-Key, Technology="THICK FILM", Termination=SMD/SMT, Tolerance=1%, Voltage Rating (DC)=75V, Weight=7.1E-05oz, Width=0.033inch
R3: library part CRCW060375K0FKEA, "Resistor;  Thick Film;  75 Kilohms;  0.1 W;  1%;  SMT;  0603;  TCR 37 ppm/DegC", Case Code (Imperial)=0603, Case Code (Metric)=1608, Manufacturer=Vishay, Max Operating Temperature=155°C, Max Power Dissipation=100mW, Min Operating Temperature=-55°C, Package Quantity=10, Resistance=75kR, Resistance Tolerance=1%, Resistor Type="Thick Film", Supplier Part Number 1=541-75.0KHCT-ND, Temperature Coefficient=100ppm/°C, Voltage Rating=75V, Case/Package=0603, Category="Chip SMD Resistors", ComponentLink1Description=https://datasheet.ciiva.com/11818/0900766b80d98afc-11818189.pdf?src-supplier=RSComponents, ComponentLink1URL=https://datasheet.ciiva.com/11818/0900766b80d98afc-11818189.pdf?src-supplier=RSComponents, ComponentLink2Description=https://datasheet.ciiva.com/16884/dcrcwe3-16884213.pdf?src-supplier=Avnet+Europe, ComponentLink2URL=https://datasheet.ciiva.com/16884/dcrcwe3-16884213.pdf?src-supplier=Avnet+Europe, ComponentLink3Description=https://datasheet.ciiva.com/26314/fld-crcw-e3-data-en-26314678.pdf?src-supplier=Distrelec, ComponentLink3URL=https://datasheet.ciiva.com/26314/fld-crcw-e3-data-en-26314678.pdf?src-supplier=Distrelec, ComponentLink4Description=https://datasheet.ciiva.com/2494/dcrcwe3-2494759.pdf?src-supplier=Digi-Key, ComponentLink4URL=https://datasheet.ciiva.com/2494/dcrcwe3-2494759.pdf?src-supplier=Digi-Key, ComponentLink5Description=https://datasheet.ciiva.com/2494/dcrcwe3-2494760.pdf?src-supplier=Digi-Key, ComponentLink5URL=https://datasheet.ciiva.com/2494/dcrcwe3-2494760.pdf?src-supplier=Digi-Key, ComponentLink6Description=https://datasheet.ciiva.com/16787/70201119-16787192.pdf?src-supplier=Allied+Electronics, ComponentLink6URL=https://datasheet.ciiva.com/16787/70201119-16787192.pdf?src-supplier=Allied+Electronics, ComponentLink7Description=https://datasheet.ciiva.com/2494/dcrcwe3-2494761.pdf?src-supplier=Digi-Key, ComponentLink7URL=https://datasheet.ciiva.com/2494/dcrcwe3-2494761.pdf?src-supplier=Digi-Key, ComponentLink8Description=https://datasheet.ciiva.com/3257/dcrcwe3-3257881.pdf?src-supplier=Avnet, ComponentLink8URL=https://datasheet.ciiva.com/3257/dcrcwe3-3257881.pdf?src-supplier=Avnet, ComponentLink9Description=https://datasheet.ciiva.com/7673/1697337-7673321.pdf?src-supplier=Element14, ComponentLink9URL=https://datasheet.ciiva.com/7673/1697337-7673321.pdf?src-supplier=Element14, ComponentLink10Description=https://datasheet.ciiva.com/16389/dcrcw-16389801.pdf?src-supplier=Future+Electronics, ComponentLink10URL=https://datasheet.ciiva.com/16389/dcrcw-16389801.pdf?src-supplier=Future+Electronics, ComponentLink11Description=https://datasheet.ciiva.com/22709/1697337-22709065.pdf?src-supplier=Element14, ComponentLink11URL=https://datasheet.ciiva.com/22709/1697337-22709065.pdf?src-supplier=Element14, ComponentLink12Description=https://datasheet.ciiva.com/7673/1697337-7673322.pdf?src-supplier=Element14, ComponentLink12URL=https://datasheet.ciiva.com/7673/1697337-7673322.pdf?src-supplier=Element14, ComponentLink13Description=https://datasheet.ciiva.com/5544/dcrcwe3-109170-5544861.pdf?src-supplier=Mouser, ComponentLink13URL=https://datasheet.ciiva.com/5544/dcrcwe3-109170-5544861.pdf?src-supplier=Mouser, ComponentLink14Description=https://datasheet.ciiva.com/7792/125364-7792397.pdf?src-supplier=Element14, ComponentLink14URL=https://datasheet.ciiva.com/7792/125364-7792397.pdf?src-supplier=Element14, Construction=Rectangular, Contact Plating=Tin, Depth=0.85mm, Features="Automotive AEC-Q200", Height=0.45mm, Lead Free="Lead Free", Length=1.55mm, Manufacturer Part Number=CRCW060375K0FKEA, Military Standard=Not, Mount="Surface Mount", Number of Pins=2, Number of Terminations=2, Packaging="Tape and Reel", Power Rating=100mW, Pricing 1="1=0,10000, 10=0,03600, 100=0,01450, 1000=0,00652, 2500=0,00566 (USD)", Radiation Hardening=No, REACH SVHC=Unknown, RoHS=Yes, RoHS Compliant=Yes, Series=CRCW, Size Code=0603, Stock 1=9117, Supplier 1=Digi-Key, Technology="THICK FILM", Termination=SMD/SMT, Tolerance=1%, Voltage Rating (DC)=75V, Weight=7.1E-05oz, Width=0.033inch
R4: library part CRCW060310K0FKEA, "VISHAY - CRCW060310K0FKEA - SMD Chip Resistor, 0603 [1608 Metric], 10 kohm, CRCW e3 Series, 75 V, Thick Film, 100 mW", Case Code (Imperial)=0603, Case Code (Metric)=1608, Manufacturer=Vishay, Max Operating Temperature=155°C, Max Power Dissipation=100mW, Min Operating Temperature=-55°C, Package Quantity=10, Resistance=10kR, Resistance Tolerance=1%, Resistor Type="Thick Film", Supplier Part Number 1=541-10.0KHCT-ND, Temperature Coefficient=100ppm/°C, Voltage Rating=75V, Case/Package=0603, Category="Chip SMD Resistors", ComponentLink1Description=https://datasheet.ciiva.com/11809/0900766b80d98afc-11809037.pdf?src-supplier=RSComponents, ComponentLink1URL=https://datasheet.ciiva.com/11809/0900766b80d98afc-11809037.pdf?src-supplier=RSComponents, ComponentLink2Description=https://datasheet.ciiva.com/16886/dcrcw-16886037.pdf?src-supplier=Avnet+Europe, ComponentLink2URL=https://datasheet.ciiva.com/16886/dcrcw-16886037.pdf?src-supplier=Avnet+Europe, ComponentLink3Description=https://datasheet.ciiva.com/26821/getdatasheetpartid-86831-26821109.pdf?src-supplier=Verical, ComponentLink3URL=https://datasheet.ciiva.com/26821/getdatasheetpartid-86831-26821109.pdf?src-supplier=Verical, ComponentLink4Description=https://datasheet.ciiva.com/16754/70201119-16754710.pdf?src-supplier=Allied+Electronics, ComponentLink4URL=https://datasheet.ciiva.com/16754/70201119-16754710.pdf?src-supplier=Allied+Electronics, ComponentLink5Description=https://datasheet.ciiva.com/16719/70201119-16719704.pdf?src-supplier=Allied+Electronics, ComponentLink5URL=https://datasheet.ciiva.com/16719/70201119-16719704.pdf?src-supplier=Allied+Electronics, ComponentLink6Description=https://datasheet.ciiva.com/2465/dcrcwe3-2465513.pdf?src-supplier=Digi-Key, ComponentLink6URL=https://datasheet.ciiva.com/2465/dcrcwe3-2465513.pdf?src-supplier=Digi-Key, ComponentLink7Description=https://datasheet.ciiva.com/5543/dcrcwe3-109170-5543001.pdf?src-supplier=Mouser, ComponentLink7URL=https://datasheet.ciiva.com/5543/dcrcwe3-109170-5543001.pdf?src-supplier=Mouser, ComponentLink8Description=https://datasheet.ciiva.com/2465/dcrcwe3-2465514.pdf?src-supplier=Digi-Key, ComponentLink8URL=https://datasheet.ciiva.com/2465/dcrcwe3-2465514.pdf?src-supplier=Digi-Key, ComponentLink9Description=https://datasheet.ciiva.com/46385/1697337-46385498.pdf?src-supplier=Element14, ComponentLink9URL=https://datasheet.ciiva.com/46385/1697337-46385498.pdf?src-supplier=Element14, ComponentLink10Description=https://datasheet.ciiva.com/2465/dcrcwe3-2465515.pdf?src-supplier=Digi-Key, ComponentLink10URL=https://datasheet.ciiva.com/2465/dcrcwe3-2465515.pdf?src-supplier=Digi-Key, ComponentLink11Description=https://datasheet.ciiva.com/3256/dcrcwe3-3256939.pdf?src-supplier=Avnet, ComponentLink11URL=https://datasheet.ciiva.com/3256/dcrcwe3-3256939.pdf?src-supplier=Avnet, ComponentLink12Description=https://datasheet.ciiva.com/3256/dcrcwe3-3256940.pdf?src-supplier=Avnet, ComponentLink12URL=https://datasheet.ciiva.com/3256/dcrcwe3-3256940.pdf?src-supplier=Avnet, ComponentLink13Description=https://datasheet.ciiva.com/16209/dcrcwe3-16209164.pdf?src-supplier=Future+Electronics, ComponentLink13URL=https://datasheet.ciiva.com/16209/dcrcwe3-16209164.pdf?src-supplier=Future+Electronics, ComponentLink14Description=https://datasheet.ciiva.com/26314/fld-crcw-e3-data-en-26314749.pdf?src-supplier=Distrelec, ComponentLink14URL=https://datasheet.ciiva.com/26314/fld-crcw-e3-data-en-26314749.pdf?src-supplier=Distrelec, Construction=Rectangular, Contact Plating=Tin,Lead, Depth=0.85mm, Features="Automotive AEC-Q200", Height=0.45mm, Lead Free="Lead Free", Length=1.55mm, Manufacturer Part Number=CRCW060310K0FKEA, Military Standard=Not, Number of Pins=2, Number of Terminations=2, Packaging="Tape and Reel", Power Rating=100mW, Pricing 1="1=0,10000, 10=0,03400, 100=0,01390, 1000=0,00624, 2500=0,00542 (USD)", Radiation Hardening=No, REACH SVHC=Unknown, RoHS=Yes, RoHS Compliant=Yes, Series=CRCW, Size Code=0603, Supplier 1=Digi-Key, Technology="THICK FILM", Termination=SMD/SMT, Tolerance=1%, Voltage Rating (DC)=75V, Weight=7.1E-05oz, Width=0.033inch
R5: library part RC0603FR-07100KL, "Res Thick Film 1.6 x 0.8 mm 100K Ohm 1% 0.1W(1/10W) 100ppm/ C Molded SMD Paper T/R", Case Code (Imperial)=0603, Case Code (Metric)=1608, Manufacturer=Yageo, Max Operating Temperature=155°C, Max Power Dissipation=100mW, Min Operating Temperature=-55°C, Resistance=100kR, Resistance Tolerance=1%, Resistor Type="Thick Film", Supplier Part Number 1=311-100KHRCT-ND, Temperature Coefficient=100ppm/°C, Voltage Rating=50V, Working Voltage=75V, Case/Package=0603, Category="Chip SMD Resistors", ComponentLink1Description=https://datasheet.ciiva.com/11808/0900766b80f96399-11808107.pdf?src-supplier=RSComponents, ComponentLink1URL=https://datasheet.ciiva.com/11808/0900766b80f96399-11808107.pdf?src-supplier=RSComponents, ComponentLink2Description=https://datasheet.ciiva.com/7983/443971-7983593.pdf?src-supplier=Element14, ComponentLink2URL=https://datasheet.ciiva.com/7983/443971-7983593.pdf?src-supplier=Element14, ComponentLink3Description=https://datasheet.ciiva.com/46440/1868787-46440889.pdf?src-supplier=Element14, ComponentLink3URL=https://datasheet.ciiva.com/46440/1868787-46440889.pdf?src-supplier=Element14, ComponentLink4Description=https://datasheet.ciiva.com/7746/1738695-7746234.pdf?src-supplier=Element14, ComponentLink4URL=https://datasheet.ciiva.com/7746/1738695-7746234.pdf?src-supplier=Element14, ComponentLink5Description=https://datasheet.ciiva.com/7746/1738695-7746235.pdf?src-supplier=Element14, ComponentLink5URL=https://datasheet.ciiva.com/7746/1738695-7746235.pdf?src-supplier=Element14, ComponentLink6Description=https://datasheet.ciiva.com/22747/443971-22747516.pdf?src-supplier=Element14, ComponentLink6URL=https://datasheet.ciiva.com/22747/443971-22747516.pdf?src-supplier=Element14, Construction=Rectangular, Depth=0.8mm, Features="Moisture Resistant", Height=0.45mm, Lead Free="Lead Free", Length=1.6mm, Manufacturer Part Number=RC0603FR-07100KL, Military Standard=Not, Number of Pins=2, Number of Terminations=2, Packaging="Tape and Reel", Power Rating=100mW, Pricing 1="1=0,10000, 10=0,02400, 100=0,00970, 1000=0,00436, 2500=0,00378 (USD)", REACH SVHC="No SVHC", RoHS=Yes, RoHS Compliant=Yes, Series=RC, Stock 1=19742442, Supplier 1=Digi-Key, Technology="THICK FILM", Termination=SMD/SMT, Tolerance=1%, Voltage Rating (DC)=50V, Width=0.8mm